# EAGLE board Converter (EAGLE 9.6.2)
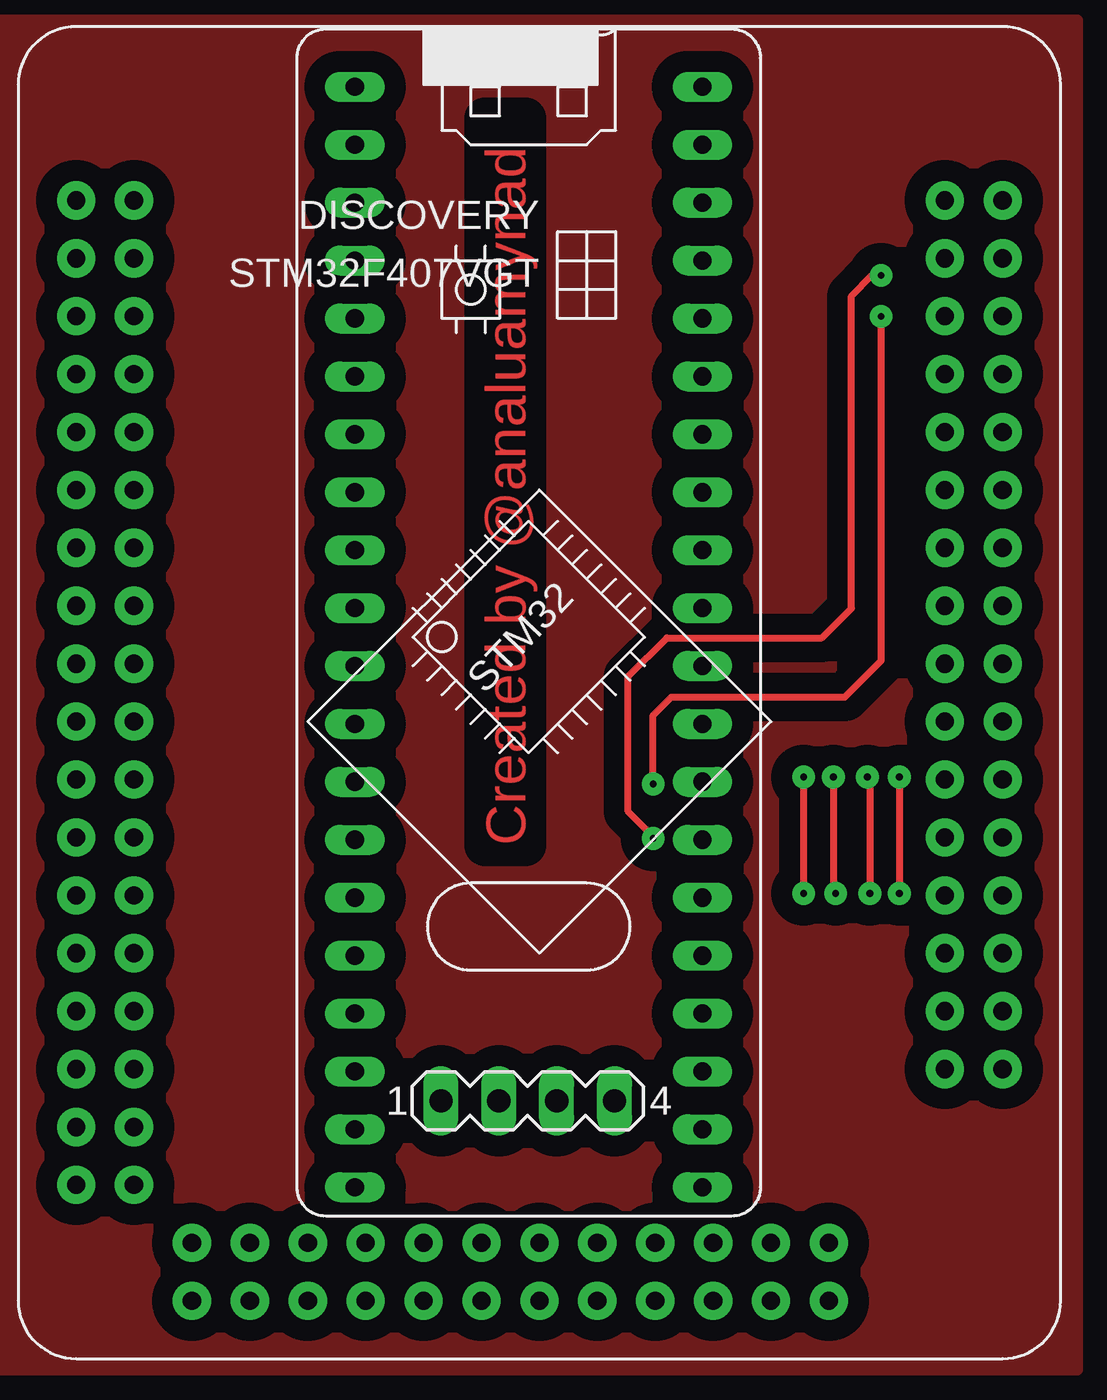
[diagram p0: board, top side]
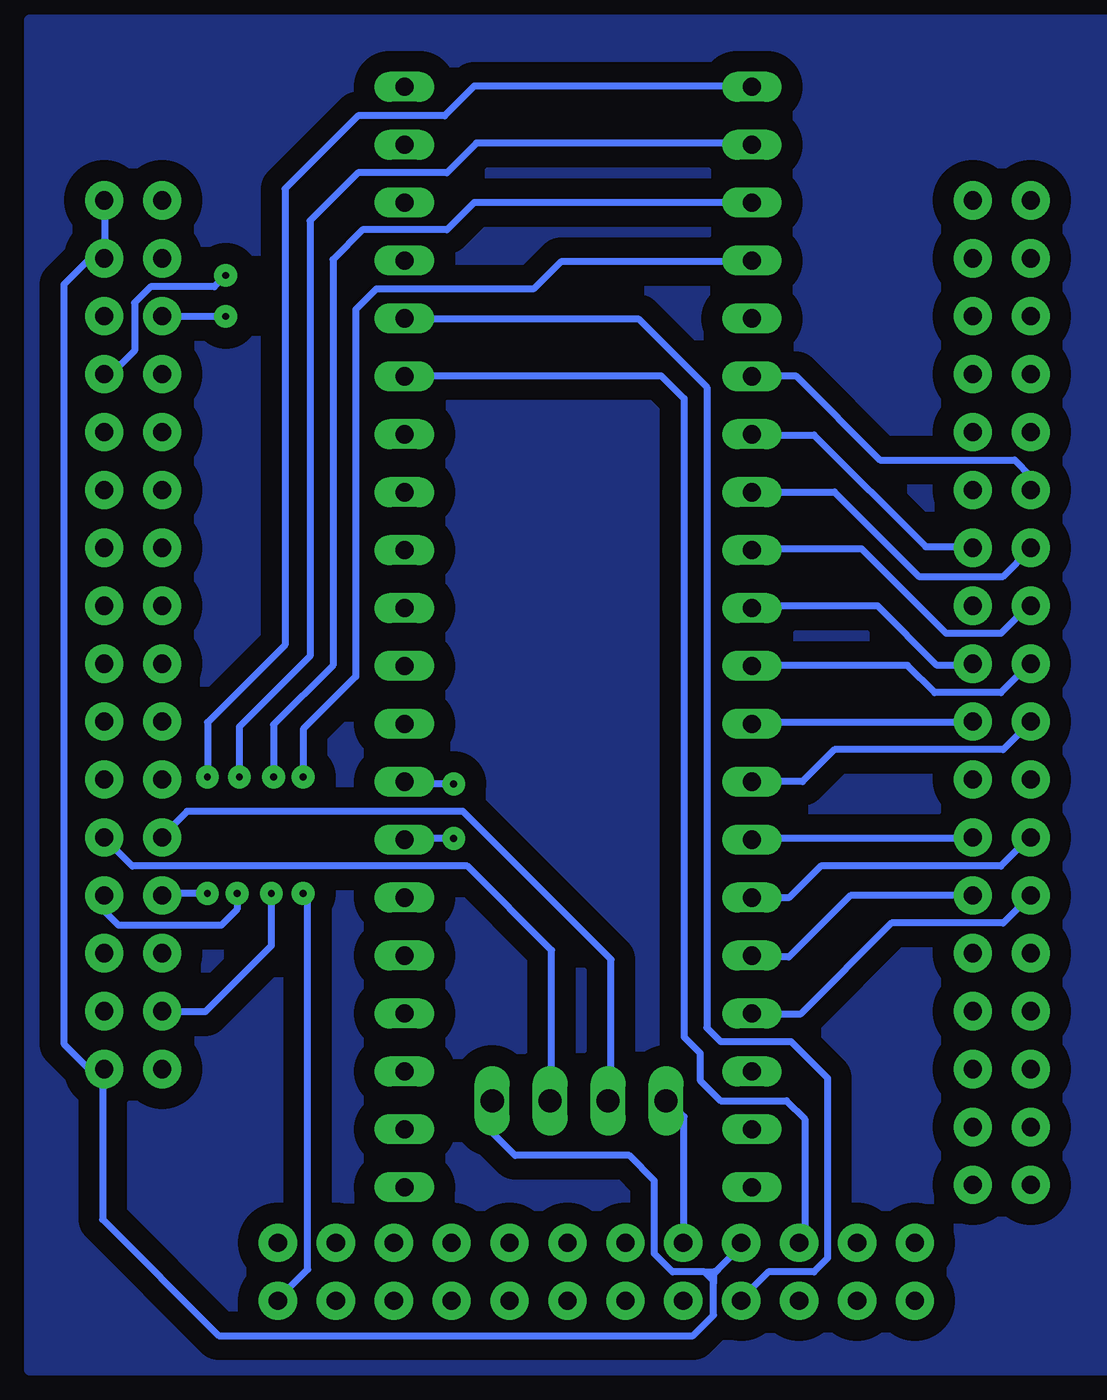
[diagram p1: board, bottom side, seen from below]

No outline drawn. Coordinates in mm, seen from the top.
Copper layers (1*16): Top 0.035mm / dielectric 1.5mm / Bottom 0.035mm
Design rules "default *": minimum track width 6mil, minimum drill 0.35mm, track to track 36mil, track to pad 36mil, pad to pad 6mil, via to via 6mil, smd to smd 6mil, copper to edge 40mil, drill to drill 6mil, minimum pad ring 10mil, minimum via ring 8mil, stop-mask expansion 4mil, vias tented up to drill 0mil, thermal gap 10mil

## Footprints (pad centres in the part's own frame; a part is rotated, then mirrored left to right if it is on the bottom)
STM32F407VGT = drill 0.8 pad 1.676: 1 22.86,12.7; 2 25.4,12.7; 3 22.86,15.24; 3.3V(0) -12.7,-25.4; 3.3V(1) 22.86,-20.32; 3.3V(3) 10.16,17.78; 4 25.4,15.24; GND -15.24,-27.94; GND(0) -15.24,-25.4; GND(1) 25.4,-20.32; GND(2) -15.24,10.16; GND(3) 12.7,17.78; PA0 25.4,-15.24; PA1 22.86,-12.7; PA2 25.4,-12.7; PA3 25.4,-10.16; PA4 22.86,-7.62; PA5 25.4,-7.62; PA6 22.86,-5.08; PA7 25.4,-5.08; PA8 -15.24,7.62; PA9 -12.7,5.08; PA10 -15.24,5.08; PA11 -12.7,2.54; PA12 -15.24,2.54; PA13 -12.7,0; PA14 -15.24,0; PA15 -12.7,-2.54; PB0 22.86,0; PB1 25.4,0; PB2 25.4,10.16; PB3 -12.7,-17.78; PB4 -15.24,-17.78; PB5 -12.7,-20.32; PB6 -15.24,-20.32; PB7 -12.7,-22.86; PB8 22.86,2.54; PB9 25.4,2.54; PB10 15.24,17.78; PB11 12.7,20.32; PB12 10.16,20.32; PB13 7.62,17.78; PB14 7.62,20.32; PB15 5.08,17.78; PC0 22.86,-17.78; PC1 25.4,-17.78; PC2 22.86,-15.24; PC3 22.86,-10.16; PC4 22.86,-2.54; PC5 25.4,-2.54; PC6 -5.08,20.32; PC7 -7.62,17.78; PC8 -7.62,20.32; PC9 -12.7,7.62; PC10 -15.24,-2.54; PC11 -12.7,-5.08; PC12 -15.24,-5.08; PC13 25.4,-22.86; PD0 -12.7,-7.62; PD1 -15.24,-7.62; PD2 -12.7,-10.16; PD3 -15.24,-10.16; PD4 -12.7,-12.7; PD5 -15.24,-12.7; PD6 -12.7,-15.24; PD7 -15.24,-15.24; PD8 5.08,20.32; PD9 2.54,17.78; PD10 2.54,20.32; PD11 0,17.78; PD12 0,20.32; PD13 -2.54,17.78; PD14 -2.54,20.32; PD15 -5.08,17.78; PE0 -15.24,-22.86; PE1 22.86,5.08; PE2 22.86,-27.94; PE3 25.4,-27.94; PE4 22.86,-25.4; PE5 25.4,-25.4; PE6 22.86,-22.86; PE7 25.4,5.08; PE8 22.86,7.62; PE9 25.4,7.62; PE10 22.86,10.16; PE11 20.32,20.32; PE12 20.32,17.78; PE13 17.78,20.32; PE14 17.78,17.78; PE15 15.24,20.32; VCC -12.7,-27.94; VCC(2) -12.7,10.16
BLUE_PILL = drill 0.8 long: P$1 -7.62,15.24; P$2 -7.62,12.7; P$3 -7.62,10.16; P$4 -7.62,7.62; P$5 -7.62,5.08; P$6 -7.62,2.54; P$7 -7.62,0; P$8 -7.62,-2.54; P$9 -7.62,-5.08; P$10 -7.62,-7.62; P$11 -7.62,-10.16; P$12 -7.62,-12.7; P$13 -7.62,-15.24; P$14 -7.62,-17.78; P$15 -7.62,-20.32; P$16 -7.62,-22.86; P$17 -7.62,-25.4; P$18 -7.62,-27.94; P$19 -7.62,-30.48; P$20 -7.62,-33.02; P$21 7.62,15.24; P$22 7.62,12.7; P$23 7.62,10.16; P$24 7.62,7.62; P$25 7.62,5.08; P$26 7.62,2.54; P$27 7.62,0; P$28 7.62,-2.54; P$29 7.62,-5.08; P$30 7.62,-7.62; P$31 7.62,-10.16; P$32 7.62,-12.7; P$33 7.62,-15.24; P$34 7.62,-17.78; P$35 7.62,-20.32; P$36 7.62,-22.86; P$37 7.62,-25.4; P$38 7.62,-27.94; P$39 7.62,-30.48; P$40 7.62,-33.02
MA04-1 = drill 1.016 long: 1 -3.81,0; 2 -1.27,0; 3 1.27,0; 4 3.81,0

## Placement (x,y rotation side)
E$1  [STM32F407VGT]  50.79,20.75 180 top
E$2  [BLUE_PILL]  45.24,38.43 0 top
E$3  [MA04-1]  45.2,9.2 0 top

## Library data of the parts
E$1 = KRSBI COMPONENT
E$2 = BluePill
E$3 = con-lstb

## Tracks (layer width: path | path; a pad name or v marks a point on that pad's centre or on a via)
S$1
  Bottom 0.3: 46.4,9.2 46.4,15.8 50.1,19.5 64.8,19.5 66,20.7
S$2
  Bottom 0.3: 43.8,9.3 43.8,15.4 50.3,21.9 62.4,21.9 63.5,20.8
S$3
  Bottom 0.3: 40.6,2.9 40.6,8.5 41.4,9.3
S$5
  Bottom 0.3: 66,48.8 66,46 66.8,46 67.8,45 67.8,11.7 66.7,10.6 66,10.6
S$6
  Bottom 0.3: 66.1,10.5 66.1,4 61,-1.1 40.2,-1.1 39.3,-0.2 39.3,1.2 39.3,1.3 | 38,2.9 39.1,1.8 39.2,1.7 | 39.2,1.7 39.3,1.7 | 39.7,1.7 41.1,1.7 41.9,2.5 41.9,5.7 43,6.8 48,6.8 49,7.8 49,9.3 | 39.3,1.7 39.3,1.3 | 39.3,1.3 39.7,1.7 | 39.7,1.7 39.3,1.7 | 39.3,1.3 39.3,1.6 39.2,1.7
S$7
  Bottom 0.3: 37.6,41 35.7,41 32,37.3 26.1,37.3 25.4,36.6 25.4,36
S$8
  Bottom 0.3: 37.7,38.4 34.9,38.4 30,33.5 27.9,33.5
S$9
  Bottom 0.3: 37.6,35.9 34,35.9 30.3,32.2 26.6,32.2 25.4,33.4 25.4,33.5
S$10
  Bottom 0.3: 25.4,31 26.7,29.7 29.1,29.7 32.8,33.4 37.7,33.4
S$11
  Bottom 0.3: 27.9,28.3 29.5,28.3 32.1,30.9 37.6,30.9
S$12
  Bottom 0.3: 25.4,28.4 26.7,27.1 29.6,27.1 30.8,28.3 37.6,28.3
S$13
  Bottom 0.3: 28,25.8 37.7,25.8
S$14
  Bottom 0.3: 25.4,25.8 26.6,24.6 34,24.6 35.4,23.2 37.5,23.2
S$15
  Bottom 0.3: 27.9,20.7 37.5,20.7
S$16
  Bottom 0.3: 25.4,20.8 26.7,19.5 34.6,19.5 36,18.1 37.6,18.1
S$17
  Bottom 0.3: 27.9,18.2 33.3,18.2 36,15.5 37.6,15.5
S$18
  Bottom 0.3: 25.4,18.2 26.6,17 31.5,17 35.5,13 37.6,13
S$19
  Bottom 0.3: 37.6,53.7 49.8,53.7 51.1,52.4 54.9,52.4 58.1,49.2 58.1,29.2 61.5,25.8 61.5,23.3
S$20
  Bottom 0.3: 37.7,51.2 49.7,51.2 51,49.9 54.9,49.9 57,47.8 57,28.7 60.1,25.6 60.1,23.3
S$21  (via drill 0.3 pad 1)
  Top 0.3: v58.6,23.4 58.6,18.3
  Bottom 0.3: 37.6,48.6 49.8,48.6 51,47.4 54.7,47.4 56,46.1 56,28.3 58.6,25.7 v58.6,23.4
S$22  (via drill 0.3 pad 1)
  Top 0.3: v57.3,23.4 v57.3,18.3
  Bottom 0.3: 37.6,46 46,46 47.2,44.8 54.1,44.8 55,43.9 55,27.8 57.3,25.5 v57.3,23.4 | 58.5,0.4 57.1,1.8 57.1,18.1 v57.3,18.3
S$23  (via drill 0.3 pad 1)
  Top 0.3: v61.5,23.4 61.5,18.4
S$24  (via drill 0.3 pad 1)
  other vias: 50.7,20.7
S$25  (via drill 0.3 pad 1)
  other vias: 60.1,23.4
S$26
  Top 0.3: 60.2,23.4 60.2,18.4
S$27  (via drill 0.3 pad 1)
  Bottom 0.3: v58.7,18.3 58.7,16 61.6,13.1 63.5,13.1
S$28  (via drill 0.3 pad 1)
  Bottom 0.3: v60.2,18.3 60.2,17.6 60.9,16.9 65.4,16.9 66.1,17.6 66.1,18.2
S$29  (via drill 0.3 pad 1)
  Bottom 0.3: v61.5,18.3 63.5,18.3
S$30
  Bottom 0.3: 49.1,9.2 49.2,9.1
S$31  (via drill 0.3 pad 1)
  Top 0.3: v50.7,23.1 50.7,26.1 51.5,26.9 59.1,26.9 60.7,28.5 v60.7,43.6
  Bottom 0.3: v50.7,23.1 52.9,23.1 | v60.7,43.6 63.4,43.6
S$32
  Bottom 0.3: 52.8,43.5 42.6,43.5 39.6,40.5 39.6,12.4 39,11.8 35.9,11.8 34.3,10.2 34.3,2.3 34.9,1.7 36.9,1.7 38.1,0.5
S$33
  Bottom 0.3: 52.8,41 41.6,41 40.6,40 40.6,12 39.9,11.3 39.9,10.1 39,9.2 36.1,9.2 35.3,8.4 35.3,3.2 35.5,3
S$34
  Bottom 0.3: 50.6,20.7 52.8,20.7
S$35  (via drill 0.3 pad 1)
  Top 0.3: 50.7,20.8 49.6,21.9 49.6,27.8 51.3,29.5 58.1,29.5 59.4,30.8 59.4,44.5 60.3,45.4 v60.7,45.4
  Bottom 0.3: v60.7,45.4 61.2,44.9 64,44.9 64.7,44.2 64.7,42.1 65.7,41.1 66,41.1
S$37
  pour Top: 22.1,56.6 69.3,56.6 69.3,49.2 69.3,-2.6 63.6,-2.6 22.1,-2.6 22.1,2.5
VV
  pour Bottom: 23.5,56.6 69.3,56.6 69.3,49.4 69.3,-2.6 63.5,-2.6 22.1,-2.6 22.1,2.9 22.1,56.6

## Text on the board
Top: Created by @analuamynad